# Altium PCB ups_lead_acid_electgpl_v1.0(1).PcbDoc (part 1 of 2)
Units mm, origin at the board's own origin, x right, y up, seen from the top; angles counter-clockwise.
Board outline 152.4 x 101.6 mm, 2 copper layers (F.Cu, B.Cu); 78 components, 42 nets, 240 pads, 288 vias.
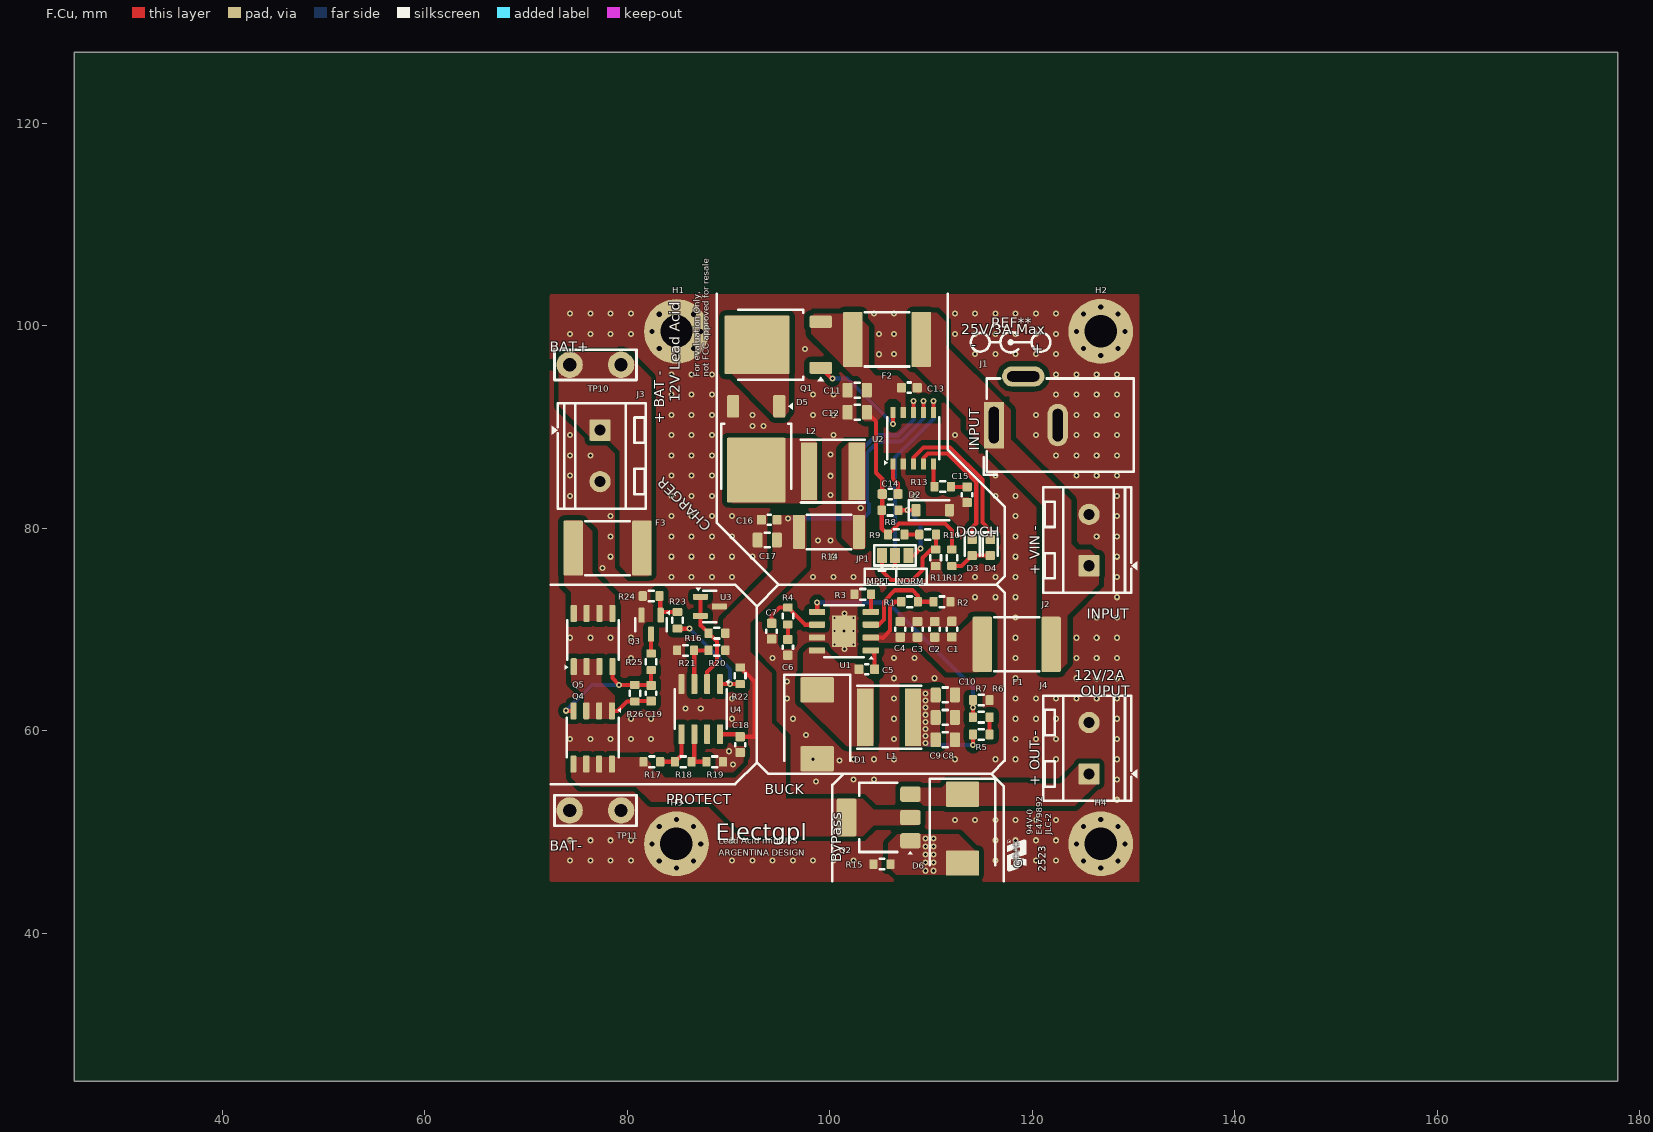
[diagram p0: F.Cu view]
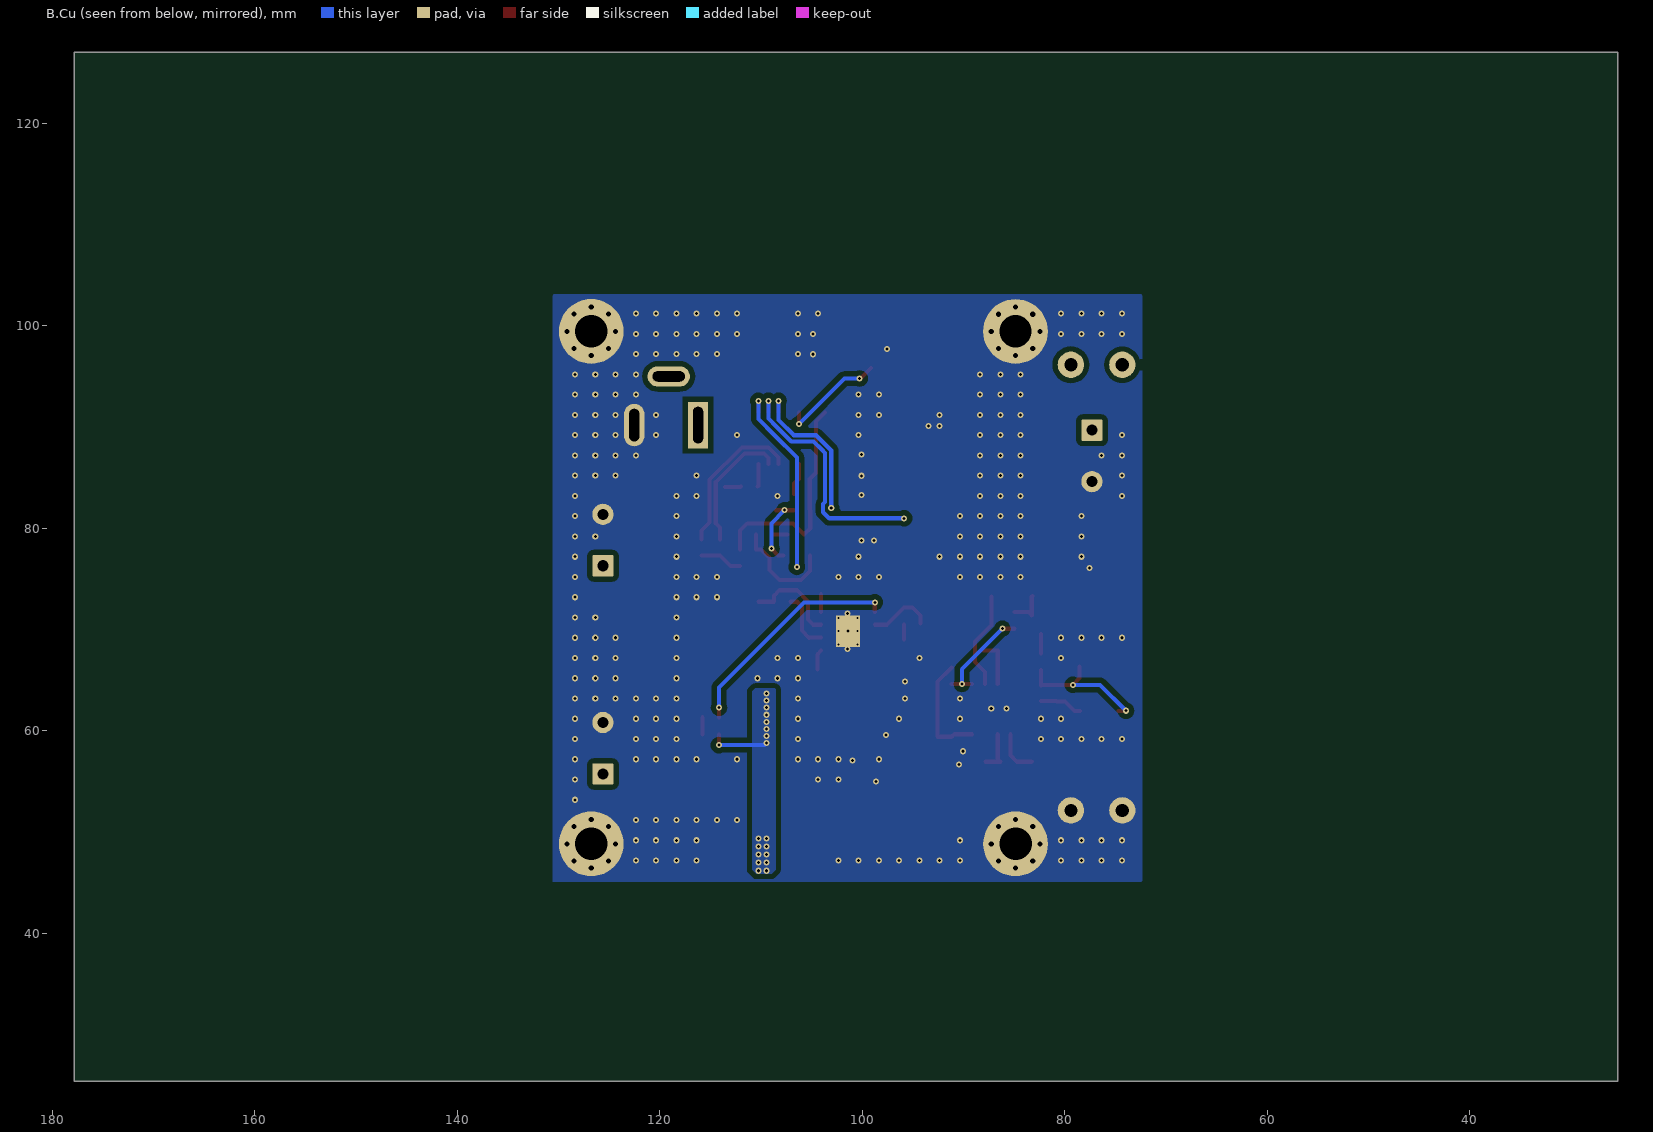
[diagram p1: B.Cu view, seen from below]

## Layer stack, top to bottom
F.Mask: solder mask 0.0102, Solder Resist, Dk 3.5
F.Cu: signal copper 0.0356
Dielectric 1: dielectric 0.32, FR-4, Dk 4.8
B.Cu: signal copper 0.0356
B.Mask: solder mask 0.0102, Solder Resist, Dk 3.5

## Board outline
25.4,25.4 177.8,25.4 177.8,127 25.4,127

## Design rules (kind name [scope] priority, off if disabled: settings)
Clearance "Clearence 0,5_Polygon" [InNamedPolygon('F.Cu-/Battery Protect/BAT+') OR InNamedPolygon('F.Cu-/ByPass/OUTBP') OR InNamedPolygon('F.Cu-Net-(D1-K)') OR InNamedPolygon('F.Cu-Net-(C19-Pad2)') OR InNamedPolygon('F.Cu-Net-(U1-VIN)') OR InNamedPolygon('F.Cu-Net-(F3-Pad2)') OR InNamedPolygon('F.Cu-Net-(D5-K)') OR InNamedPolygon('F.Cu-Net-(Q1-S)') OR InNamedPolygon('F.Cu-/Battery Protect/P+') OR InNamedPolygon('F.Cu-/Buck/VIN') OR InNamedPolygon('F.Cu-Net-(Q1-D)') OR InNamedPolygon('F.Cu-Net-(Q1-S)-1') OR InNamedPolygon('F.Cu-/Buck/VIN-1') OR InNamedPolygon('F.Cu-+12V') OR InNamedPolygon('F.Cu-+12V-1') OR InNamedPolygon('F.Cu-/Battery Protect/P+-1') OR InNamedPolygon('F.Cu-Net-(U2-CSP)') OR InNamedPolygon('F.Cu-/Buck/VIN-2') OR InNamedPolygon('F.Cu-GND') OR InNamedPolygon('B.Cu-GND') OR InNamedPolygon('B.Cu-+12V')] p1: gap=0.5 ignorepadtopadclearanceinfootprint=FALSE
MinimumSolderMaskSliver [All] p1: minsoldermaskwidth=0
PolygonConnect Polygon_B.Cu-+12V_ConnectDirect [IsNamedPolygon('B.Cu-+12V')] p1: connectstyle=Direct reliefconductorwidth=0.254 reliefentries=4 polygonreliefangle="90 Angle" airgapwidth=0.254
PolygonConnect Polygon_B.Cu-GND_ConnectDirect [IsNamedPolygon('B.Cu-GND')] p2: connectstyle=Direct reliefconductorwidth=0.254 reliefentries=4 polygonreliefangle="90 Angle" airgapwidth=0.254
PolygonConnect Polygon_F.Cu-GND_ConnectDirect [IsNamedPolygon('F.Cu-GND')] p3: connectstyle=Direct reliefconductorwidth=0.254 reliefentries=4 polygonreliefangle="90 Angle" airgapwidth=0.254
PolygonConnect Polygon_F.Cu-/Buck/VIN-2_ConnectDirect [IsNamedPolygon('F.Cu-/Buck/VIN-2')] p4: connectstyle=Direct reliefconductorwidth=0.254 reliefentries=4 polygonreliefangle="90 Angle" airgapwidth=0.254
PolygonConnect Polygon_F.Cu-Net-(U2-CSP)_ConnectDirect [IsNamedPolygon('F.Cu-Net-(U2-CSP)')] p5: connectstyle=Direct reliefconductorwidth=0.254 reliefentries=4 polygonreliefangle="90 Angle" airgapwidth=0.254
PolygonConnect "Polygon_F.Cu-/Battery Protect/P+-1_ConnectDirect" [IsNamedPolygon('F.Cu-/Battery Protect/P+-1')] p6: connectstyle=Direct reliefconductorwidth=0.254 reliefentries=4 polygonreliefangle="90 Angle" airgapwidth=0.254
PolygonConnect Polygon_F.Cu-+12V-1_ConnectDirect [IsNamedPolygon('F.Cu-+12V-1')] p7: connectstyle=Direct reliefconductorwidth=0.254 reliefentries=4 polygonreliefangle="90 Angle" airgapwidth=0.254
PolygonConnect Polygon_F.Cu-+12V_ConnectDirect [IsNamedPolygon('F.Cu-+12V')] p8: connectstyle=Direct reliefconductorwidth=0.254 reliefentries=4 polygonreliefangle="90 Angle" airgapwidth=0.254
PolygonConnect Polygon_F.Cu-/Buck/VIN-1_ConnectDirect [IsNamedPolygon('F.Cu-/Buck/VIN-1')] p9: connectstyle=Direct reliefconductorwidth=0.254 reliefentries=4 polygonreliefangle="90 Angle" airgapwidth=0.254
PolygonConnect Polygon_F.Cu-Net-(Q1-S)-1_ConnectDirect [IsNamedPolygon('F.Cu-Net-(Q1-S)-1')] p10: connectstyle=Direct reliefconductorwidth=0.254 reliefentries=4 polygonreliefangle="90 Angle" airgapwidth=0.254
PolygonConnect Polygon_F.Cu-Net-(Q1-D)_ConnectDirect [IsNamedPolygon('F.Cu-Net-(Q1-D)')] p11: connectstyle=Direct reliefconductorwidth=0.254 reliefentries=4 polygonreliefangle="90 Angle" airgapwidth=0.254
PolygonConnect Polygon_F.Cu-/Buck/VIN_ConnectDirect [IsNamedPolygon('F.Cu-/Buck/VIN')] p12: connectstyle=Direct reliefconductorwidth=0.254 reliefentries=4 polygonreliefangle="90 Angle" airgapwidth=0.254
PolygonConnect "Polygon_F.Cu-/Battery Protect/P+_ConnectDirect" [IsNamedPolygon('F.Cu-/Battery Protect/P+')] p13: connectstyle=Direct reliefconductorwidth=0.254 reliefentries=4 polygonreliefangle="90 Angle" airgapwidth=0.254
PolygonConnect Polygon_F.Cu-Net-(Q1-S)_ConnectDirect [IsNamedPolygon('F.Cu-Net-(Q1-S)')] p14: connectstyle=Direct reliefconductorwidth=0.254 reliefentries=4 polygonreliefangle="90 Angle" airgapwidth=0.254
PolygonConnect Polygon_F.Cu-Net-(D5-K)_ConnectDirect [IsNamedPolygon('F.Cu-Net-(D5-K)')] p15: connectstyle=Direct reliefconductorwidth=0.254 reliefentries=4 polygonreliefangle="90 Angle" airgapwidth=0.254
PolygonConnect Polygon_F.Cu-Net-(F3-Pad2)_ConnectDirect [IsNamedPolygon('F.Cu-Net-(F3-Pad2)')] p16: connectstyle=Direct reliefconductorwidth=0.254 reliefentries=4 polygonreliefangle="90 Angle" airgapwidth=0.254
PolygonConnect Polygon_F.Cu-Net-(U1-VIN)_ConnectDirect [IsNamedPolygon('F.Cu-Net-(U1-VIN)')] p17: connectstyle=Direct reliefconductorwidth=0.254 reliefentries=4 polygonreliefangle="90 Angle" airgapwidth=0.254
PolygonConnect Polygon_F.Cu-Net-(C19-Pad2)_ConnectDirect [IsNamedPolygon('F.Cu-Net-(C19-Pad2)')] p18: connectstyle=Direct reliefconductorwidth=0.254 reliefentries=4 polygonreliefangle="90 Angle" airgapwidth=0.254
PolygonConnect Polygon_F.Cu-Net-(D1-K)_ConnectDirect [IsNamedPolygon('F.Cu-Net-(D1-K)')] p19: connectstyle=Direct reliefconductorwidth=0.254 reliefentries=4 polygonreliefangle="90 Angle" airgapwidth=0.254
PolygonConnect Polygon_F.Cu-/ByPass/OUTBP_ConnectDirect [IsNamedPolygon('F.Cu-/ByPass/OUTBP')] p20: connectstyle=Direct reliefconductorwidth=0.254 reliefentries=4 polygonreliefangle="90 Angle" airgapwidth=0.254
PolygonConnect "Polygon_F.Cu-/Battery Protect/BAT+_ConnectDirect" [IsNamedPolygon('F.Cu-/Battery Protect/BAT+')] p21: connectstyle=Direct reliefconductorwidth=0.254 reliefentries=4 polygonreliefangle="90 Angle" airgapwidth=0.254
RoutingVias [All] p1: holewidth=0.711 width=1.27 viastyle="Through Hole" minholewidth=0.711 minwidth=1.27 maxholewidth=0.711 maxwidth=1.27
SilkToSilkClearance [All] p1: silktosilkclearance=0
SilkToSolderMaskClearance [IsPad] p1: minsilkscreentomaskgap=0 clearancetoexposedcopper=TRUE
SolderMaskExpansion [All] p1: expansion=0.102 istentingtop=FALSE
Width [All] p1: maxlimit=10 minlimit=0.254 preferedwidth=0.254 minimp=50.000000 maximp=50.000000 favimp=50.000000
27 further rules are at their usual default settings.

## Components (designator, comment, footprint, x,y, rotation, side; value= is the part's Value field where it differs from the comment)
C1 "Comment" C_0603_1608Metric 112.056,70.043 r270 top value=2u2
C2 "Comment" C_0603_1608Metric 110.356,70.018 r270 top value=2u2
C3 "Comment" C_0603_1608Metric 108.656,70.018 r270 top value=2u2
C4 "Comment" C_0603_1608Metric 106.956,70.018 r270 top value=2u2
C5 "Comment" C_0603_1608Metric 103.656,66.085 r180 top value=100n
C6 "Comment" C_0603_1608Metric 95.856,68.243 r270 top value=4n7
C7 "Comment" C_0603_1608Metric 94.256,69.843 r270 top value=47p
C8 "Comment" C_0805_2012Metric 111.406,59.123 r180 top value=47u
C9 "Comment" C_0805_2012Metric 111.406,61.323 r180 top value=47u
C10 "Comment" C_0805_2012Metric 111.406,63.543 r180 top value=47u
C11 "Comment" C_0805_2012Metric 102.706,93.643 r180 top value=47u
C12 "Comment" C_0805_2012Metric 102.706,91.443 r180 top value=47u
C13 "Comment" C_0603_1608Metric 107.856,93.885 r0 top value=100n
C14 "Comment" C_0603_1608Metric 105.956,83.385 r0 top value=100n
C15 "Comment" C_0603_1608Metric 113.556,83.318 r270 top value=220n
C16 "Comment" C_0603_1608Metric 94.018,80.843 r180 top value=100n
C17 "Comment" C_0805_2012Metric 93.818,78.843 r180 top value=47u
C18 "Comment" C_0603_1608Metric 91.156,58.643 r270 top value=100n
C19 "Comment" C_0603_1608Metric 82.356,63.718 r270 top value=10n
D1 "Comment" D_SMC 98.756,60.642 r270 top value=SS54
D2 "Comment" D_SOD-123 110.156,81.785 r0 top value=5V1
D3 "Comment" LED_0603_1608Metric 114.056,78.098 r270 top value=LED
D4 "Comment" LED_0603_1608Metric 115.856,78.098 r270 top value=LED
D5 "Comment" TO-252-2 92.734,87.003 r270 top value=MBRD20100CT
D6 "Comment" D_SMC 113.106,50.343 r270 top value=SS54
F1 "Comment" Fuse_2920_7451Metric 118.456,68.543 r180 top value=500/24N
F2 "Comment" Fuse_2920_7451Metric 105.656,98.643 r180 top value=500/24N
F3 "Comment" Fuse_2920_7451Metric 78.056,78.043 r180 top value=500/24N
G*** "Comment" "Recognized Component very small" 118.456,47.685 r90 top value=LOGO
H1 "Comment" MountingHole_3.2mm_M3_Pad_Via 84.859,99.44 r0 top value=MountingHole_Pad
H2 "Comment" MountingHole_3.2mm_M3_Pad_Via 126.756,99.443 r0 top value=MountingHole_Pad
H3 "Comment" MountingHole_3.2mm_M3_Pad_Via 84.856,48.843 r0 top value=MountingHole_Pad
H4 "Comment" MountingHole_3.2mm_M3_Pad_Via 126.756,48.843 r0 top value=MountingHole_Pad
J1 "Comment" BarrelJack_GCT_DCJ200-10-A_Horizontal 116.206,90.193 r90 top value=Barrel_Jack_Switch
J2 "Comment" TerminalBlock_RND_205-00232_1x02_P5.08mm_Horizontal 125.598,76.298 r90 top value=Screw_Terminal_01x02
J3 "Comment" TerminalBlock_RND_205-00232_1x02_P5.08mm_Horizontal 77.314,89.688 r270 top value=Screw_Terminal_01x02
J4 "Comment" TerminalBlock_RND_205-00232_1x02_P5.08mm_Horizontal 125.598,55.743 r90 top value=Screw_Terminal_01x02
JP1 "Comment" SolderJumper-3_P1.3mm_Open_Pad1.0x1.5mm 106.456,77.328 r0 top value=MPPT
L1 "Comment" L_Taiyo-Yuden_NR-60xx 105.856,61.343 r0 top value=10u
L2 "Comment" L_Taiyo-Yuden_NR-60xx 100.306,85.643 r0 top value=10u
Q1 "Comment" TO-252-2 94.073,98.115 r180 top value=DMP4051LK3-13
Q2 "Comment" SOT-223-3_TabPin2 104.806,51.443 r180 top value=NTF6P02
Q3 "Comment" SOT-23 82.356,70.48 r270 top value=2N7002
Q4 "Comment" SOP-8_3.9x4.9mm_P1.27mm 76.586,59.343 r270 top value=AO4407
Q5 "Comment" SOP-8_3.9x4.9mm_P1.27mm 76.621,68.967 r90 top value=AO4407
R1 "Comment" R_0603_1608Metric 107.881,72.743 r0 top value=442k
R2 "Comment" R_0603_1608Metric 111.081,72.743 r0 top value=90k9
R3 "Comment" R_0603_1608Metric 103.256,73.485 r180 top value=243k
R4 "Comment" R_0603_1608Metric 95.856,71.343 r270 top value=16k9
R5 "Comment" R_0603_1608Metric 114.956,59.643 r0 top value=49R9
R6 "Comment" R_0603_1608Metric 114.956,61.343 r180 top value=33k
R7 "Comment" R_0603_1608Metric 114.956,63.043 r0 top value=2k2
R8 "Comment" R_0603_1608Metric 105.956,81.785 r0 top value=100k
R9 "Comment" R_0603_1608Metric 106.556,79.385 r0 top value=1M
R10 "Comment" R_0603_1608Metric 109.656,79.385 r0 top value=360k
R11 "Comment" R_0603_1608Metric 110.456,77.085 r270 top value=100k
R12 "Comment" R_0603_1608Metric 112.056,77.085 r270 top value=10k
R13 "Comment" R_0603_1608Metric 111.156,84.118 r0 top value=120R
R14 "Comment" R_2512_6332Metric 99.918,79.643 r180 top value=0R12
R15 "Comment" R_0603_1608Metric 105.156,46.843 r0 top value=100k
R16 "Comment" R_0603_1608Metric 88.856,69.643 r180 top value=10k
R17 "Comment" R_0603_1608Metric 82.431,56.943 r0 top value=47k
R18 "Comment" R_0603_1608Metric 85.531,56.943 r0 top value=47k
R19 "Comment" R_0603_1608Metric 88.631,56.943 r0 top value=47k
R20 "Comment" R_0603_1608Metric 88.856,67.943 r180 top value=15k
R21 "Comment" R_0603_1608Metric 85.756,67.943 r180 top value=4k7
R22 "Comment" R_0603_1608Metric 91.156,65.443 r270 top value=10k
R23 "Comment" R_0603_1608Metric 84.956,70.918 r90 top value=10k
R24 "Comment" R_0603_1608Metric 82.356,73.318 r180 top value=10k
R25 "Comment" R_0603_1608Metric 82.356,66.818 r90 top value=10R
R26 "Comment" R_0603_1608Metric 80.756,63.718 r270 top value=10k
REF** "Comment" Symbol_Barrel_Polarity 117.856,98.443 r0 top value=Symbol_Barrel_Polarity
TP10 "Comment" TestPoint_Bridge_Pitch5.08mm_Drill1.3mm 74.316,96.143 r0 top value=TestPoint_Alt
TP11 "Comment" TestPoint_Bridge_Pitch5.08mm_Drill1.3mm 74.316,52.143 r0 top value=TestPoint_Alt
U1 "Comment" HSOP-8-1EP_3.9x4.9mm_P1.27mm_EP2.41x3.1mm_ThermalVias 101.401,69.843 r180 top value=TPS54360DDA
U2 "Comment" SSOP-10_3.9x4.9mm_P1.00mm 108.256,88.885 r90 top value=CN3767
U3 "Comment" SOT-23 88.156,72.285 r0 top value=TL431AIDBZR
U4 "Comment" SOIC-8_3.9x4.9mm_P1.27mm 87.256,62.143 r270 top value=LM393

## Footprints (in the part's own frame and the unit in brackets; to place one, negate y for a bottom-side part, rotate by r counter-clockwise, add the part's x,y. Pads: shape width x height; smd on the part's side, far side on the other; paste and mask are expansions set on the pad)
BarrelJack_GCT_DCJ200-10-A_Horizontal [mm]
  rect 4.6x2 hole 1 slot 3.6 at 0 deg mask+0: 1(0,0)
  rrect100% 4.2x2 hole 1 slot 3.2 at 0 deg mask+0: 2(0,-6.3)
  rrect100% 2x4.2 hole 3.2 slot 1 at 0 deg mask+0: 3(4.8,-2.9)
  silkscreen extent -4.9,-13.8 4.6,1
C_0603_1608Metric [mm]
  rrect25% 0.9x0.95 smd mask+0: 1(-0.775,0) 2(0.775,0)
  silkscreen extent -0.14,-0.51 0.14,0.51
C_0805_2012Metric [mm]
  rrect25% 1x1.45 smd mask+0: 1(-0.95,0) 2(0.95,0)
  silkscreen extent -0.26,-0.73 0.26,0.73
D_SMC [mm]
  rrect10% 2.5x3.3 smd mask+0: 1(-3.4,0) 2(3.4,0)
  silkscreen extent -4.91,-3.25 3.6,3.25
D_SOD-123 [mm]
  rrect25% 0.9x1.2 smd mask+0: 1(-1.65,0) 2(1.65,0)
  silkscreen extent -2.36,-1 1.65,1
Fuse_2920_7451Metric [mm]
  rrect13% 1.925x5.45 smd mask+0: 1(-3.387,0) 2(3.387,0)
  silkscreen extent -2.2,-2.67 2.2,2.67
HSOP-8-1EP_3.9x4.9mm_P1.27mm_EP2.41x3.1mm_ThermalVias [mm]
  rrect25% 1.6x0.6 smd mask+0: 1(-2.65,1.905) 2(-2.65,0.635) 3(-2.65,-0.635) 4(-2.65,-1.905) 5(2.65,-1.905) 6(2.65,-0.635) 7(2.65,0.635) 8(2.65,1.905)
  round 0.5 hole 0.2 mask+0: 9(-0.955,1.3) 9(-0.955,0) 9(-0.955,-1.3) 9(0.955,1.3) 9(0.955,0) 9(0.955,-1.3)
  rect 2.41x3.1 smd paste-3.1 mask+0: 9(0,0)
  rect 2.41x3.1 smd far side paste-3.1 mask-3.1: 9(0,0)
  rrect25% 0.97x1.25 on Top Paste mask-1.25: Un1(-0.6,0.775) Un2(-0.6,-0.775) Un3(0.6,0.775) Un4(0.6,-0.775)
  silkscreen extent -2.94,-2.56 1.95,2.8
L_Taiyo-Yuden_NR-60xx [mm]
  rect 1.6x5.7 smd mask+0: 1(-2.35,0) 2(2.35,0)
  silkscreen extent -3.15,-3.1 3.15,3.1
LED_0603_1608Metric [mm]
  rrect25% 0.875x0.95 smd mask+0: 1(-0.787,0) 2(0.787,0)
  silkscreen extent -1.49,-0.73 0.8,0.73
MountingHole_3.2mm_M3_Pad_Via [mm]
  round 0.8 hole 0.5 mask+0: 1(-2.4,0) 1(-1.697,-1.697) 1(-1.697,1.697) 1(0,-2.4) 1(0,2.4) 1(1.697,-1.697) 1(1.697,1.697) 1(2.4,0)
  round 6.4 hole 3.2 mask+0: 1(0,0)
R_0603_1608Metric [mm]
  rrect25% 0.8x0.95 smd mask+0: 1(-0.825,0) 2(0.825,0)
  silkscreen extent -0.24,-0.52 0.24,0.52
R_2512_6332Metric [mm]
  rrect20% 1.225x3.35 smd mask+0: 1(-2.963,0) 2(2.963,0)
  silkscreen extent -2.18,-1.71 2.18,1.71
"Recognized Component very small" [mm]
  silkscreen extent -1.56,-0.94 1.56,0.94
SOIC-8_3.9x4.9mm_P1.27mm [mm]
  rrect25% 1.95x0.6 smd mask+0: 1(-2.475,1.905) 2(-2.475,0.635) 3(-2.475,-0.635) 4(-2.475,-1.905) 5(2.475,-1.905) 6(2.475,-0.635) 7(2.475,0.635) 8(2.475,1.905)
  silkscreen extent -2.94,-2.56 1.95,2.8
SolderJumper-3_P1.3mm_Open_Pad1.0x1.5mm [mm]
  rect 1x1.5 smd paste-1.5 mask+0: 1(-1.3,0) 2(0,0) 3(1.3,0)
  silkscreen extent -2.05,-1.5 2.05,1
SOP-8_3.9x4.9mm_P1.27mm [mm]
  rrect25% 1.65x0.6 smd mask+0: 1(-2.625,1.905) 2(-2.625,0.635) 3(-2.625,-0.635) 4(-2.625,-1.905) 5(2.625,-1.905) 6(2.625,-0.635) 7(2.625,0.635) 8(2.625,1.905)
  silkscreen extent -2.94,-2.56 1.95,2.8
SOT-23 [mm]
  rrect25% 1.475x0.6 smd mask+0: 1(-0.937,0.95) 2(-0.937,-0.95) 3(0.937,0)
  silkscreen extent -1.4,-1.56 0.65,1.84
SOT-223-3_TabPin2 [mm]
  rrect25% 2x1.5 smd mask+0: 1(-3.15,2.3) 2(-3.15,0) 3(-3.15,-2.3)
  rrect25% 2x3.8 smd mask+0: 2(3.15,0)
  silkscreen extent -3.37,-3.41 1.91,3.64
SSOP-10_3.9x4.9mm_P1.00mm [mm]
  rect 1.1x0.51 smd mask+0: 1(-2.55,2) 2(-2.55,1) 3(-2.55,0) 4(-2.55,-1) 5(-2.55,-2) 6(2.55,-2) 7(2.55,-1) 8(2.55,0) 9(2.55,1) 10(2.55,2)
  silkscreen extent -2.64,-2.57 2.07,2.86
Symbol_Barrel_Polarity [mm]
  silkscreen extent -3.92,-1.08 3.92,0.93
TerminalBlock_RND_205-00232_1x02_P5.08mm_Horizontal [mm]
  rrect12% 2.1x2.1 hole 1.1 mask+0: 1(0,0)
  round 2.1 hole 1.1 mask+0: 2(5.08,0)
  silkscreen extent -2.66,-4.78 7.74,4.52
TestPoint_Bridge_Pitch5.08mm_Drill1.3mm [mm]
  round 2.6 hole 1.3 mask+0: 1(0,0) 1(5.08,0)
  silkscreen extent -1.5,-1.5 6.6,1.5
TO-252-2 [mm]
  rrect21% 2.2x1.2 smd mask+0: 1(-5.04,2.28) 3(-5.04,-2.28)
  rrect4% 6.4x5.8 smd paste-6.4 mask+0: 2(1.26,0)
  rrect9% 3.05x2.75 on Top Paste mask-3.05: Un1(-0.415,1.525) Un2(-0.415,-1.525) Un3(2.935,1.525) Un4(2.935,-1.525)
  silkscreen extent -5.38,-3.45 3.11,3.61

## Part data
C1 C2 C3 C4: library part C_0603_1608Metric, "Capacitor SMD 0603 (1608 Metric), square (rectangular) end terminal, IPC-7351 nominal, (Body size source: IPC-SM-782 page 76, https://www.pcb-3d.com/wordpress/wp-content/uploads/ipc-sm-782a_amendment_1_and_2.pdf), generated with kicad-footprint-generator", LCSC=C913904, MFR P/N=CL10A225KB8NNNC, Description="Unpolarized capacitor", Absolute minimum=100V, Reference MFG P/N=C6119935, ki_fp_filters=C_*
C5 C13 C14 C16 C18: library part C_0603_1608Metric, "Capacitor SMD 0603 (1608 Metric), square (rectangular) end terminal, IPC-7351 nominal, (Body size source: IPC-SM-782 page 76, https://www.pcb-3d.com/wordpress/wp-content/uploads/ipc-sm-782a_amendment_1_and_2.pdf), generated with kicad-footprint-generator", LCSC=C1591, MFR P/N=CL10B104KB8NNNC, ki_fp_filters=C_*
  C5: Description="Unpolarized capacitor", Absolute minimum=50V, Reference MFG P/N=C5142567
  C13 C14 C16: Internal P/N=C100N-50-0603
  C18: Description="Unpolarized capacitor, small symbol"
C6: library part C_0603_1608Metric, "Capacitor SMD 0603 (1608 Metric), square (rectangular) end terminal, IPC-7351 nominal, (Body size source: IPC-SM-782 page 76, https://www.pcb-3d.com/wordpress/wp-content/uploads/ipc-sm-782a_amendment_1_and_2.pdf), generated with kicad-footprint-generator", LCSC=C1621, MFR P/N=CL10B472KB8NNNC, Description="Unpolarized capacitor", Absolute minimum=50V, Reference MFG P/N=C7503510, ki_fp_filters=C_*
C7: library part C_0603_1608Metric, "Capacitor SMD 0603 (1608 Metric), square (rectangular) end terminal, IPC-7351 nominal, (Body size source: IPC-SM-782 page 76, https://www.pcb-3d.com/wordpress/wp-content/uploads/ipc-sm-782a_amendment_1_and_2.pdf), generated with kicad-footprint-generator", LCSC=C1671, MFR P/N=CL10C470JB8NNNC, Description="Unpolarized capacitor", Absolute minimum=50V, Reference MFG P/N=C466230, ki_fp_filters=C_*
C8 C9 C10 C11 C12 C17: library part C_0805_2012Metric, "Capacitor SMD 0805 (2012 Metric), square (rectangular) end terminal, IPC-7351 nominal, (Body size source: IPC-SM-782 page 76, https://www.pcb-3d.com/wordpress/wp-content/uploads/ipc-sm-782a_amendment_1_and_2.pdf, https://docs.google.com/spreadsheets/d/1BsfQQcO9C6DZCsRaXUlFlo91Tg2WpOkGARC1WS5S8t0/edit?usp=sharing), generated with kicad-footprint-generator", LCSC=C602037, MFR P/N=CL21A226MAYNNNE
  C8 C9 C10: Description="Unpolarized capacitor", Absolute minimum=10V, Reference MFG P/N=C19103846, ki_fp_filters=C_*
  C11 C12 C17: Internal P/N=C47U-25-5_5.4, ki_fp_filters=CP_*
C15: library part C_0603_1608Metric, "Capacitor SMD 0603 (1608 Metric), square (rectangular) end terminal, IPC-7351 nominal, (Body size source: IPC-SM-782 page 76, https://www.pcb-3d.com/wordpress/wp-content/uploads/ipc-sm-782a_amendment_1_and_2.pdf), generated with kicad-footprint-generator", LCSC=C64705, MFR P/N=CL10B224KB8NNNC, Internal P/N=C220N-50-0603, ki_fp_filters=C_*
C19: library part C_0603_1608Metric, "Capacitor SMD 0603 (1608 Metric), square (rectangular) end terminal, IPC-7351 nominal, (Body size source: IPC-SM-782 page 76, https://www.pcb-3d.com/wordpress/wp-content/uploads/ipc-sm-782a_amendment_1_and_2.pdf), generated with kicad-footprint-generator", LCSC=C1589, MFR P/N=CL10B103KB8NNNC, Description="Unpolarized capacitor, small symbol", ki_fp_filters=C_*
D1 D6: library part D_SMC, "Diode SMC (DO-214AB)", LCSC=C5199108, MFR P/N=SS54, Datasheet=http://www.jameco.com/Jameco/Products/ProdDS/1538777.pdf, Description="40V 2A Schottky Barrier Rectifier Diode, SMB", Absolute minimum="40V 5A", Reference MFG P/N=C5200096, ki_fp_filters=D*SMB*
D2: library part D_SOD-123, "SOD-123", LCSC=C66198, MFR P/N=MMSZ5231BT1G, Internal P/N=DZ-5.1, ki_fp_filters="TO-???* *_Diode_* *SingleDiode* D_*"
D3 D4: library part LED_0603_1608Metric, "LED SMD 0603 (1608 Metric), square (rectangular) end terminal, IPC-7351 nominal, (Body size source: http://www.tortai-tech.com/upload/download/2011102023233369053.pdf), generated with kicad-footprint-generator", LCSC=C965802, MFR P/N=XL-1608UYC-06, ki_fp_filters="LED* LED_SMD:* LED_THT:*"
  D3: Internal P/N=DL-GREEN-0603
  D4: Internal P/N=DL-RED-0603
D5: library part TO-252-2, "TO-252/DPAK SMD package, http://www.infineon.com/cms/en/product/packages/PG-TO252/PG-TO252-3-1/", LCSC=C460890, MFR P/N=MBRD20100CT-13, Description="20A SCHOTTKY BARRIER RECTIFIER"
F1 F2 F3: library part Fuse_2920_7451Metric, "Fuse SMD 2920 (7451 Metric), square (rectangular) end terminal, IPC-7351 nominal, (Body size from: http://www.megastar.com/products/fusetronic/polyswitch/PDF/smd2920.pdf), generated with kicad-footprint-generator", LCSC=C6165172, MFR P/N=SMD2920-500/24N, Description="24V 5A 40A 10A 2920 Resettable Fuses ROHS", Absolute minimum="16V 3A", Reference MFG P/N=C6165172, ki_fp_filters="*polyfuse* *PTC*"
G***: library part "Recognized Component very small"
H1 H2 H3 H4: library part MountingHole_3.2mm_M3_Pad_Via, "Mounting Hole 3.2mm, M3, generated by kicad-footprint-generator mountinghole.py", Description="Mounting Hole with connection", ki_fp_filters=MountingHole*Pad*
J1: library part BarrelJack_GCT_DCJ200-10-A_Horizontal, "Barrel jack connector (5.5 mm outer diameter, 2.05 inner diameter ), https://gct.co/files/drawings/dcj200-10.pdf", LCSC=C194407, MFR P/N=DC-470-2.1GP, Description="DC Barrel Jack with an internal switch", ki_fp_filters=BarrelJack*
J2 J3 J4: library part TerminalBlock_RND_205-00232_1x02_P5.08mm_Horizontal, "terminal block RND 205-00232, 2 pins, pitch 5.08mm, size 10.2x8.45mm, drill diameter 1.1mm, pad diameter 2.1mm, http://cdn-reichelt.de/documents/datenblatt/C151/RND_205-00232_DB_EN.pdf, script-generated using https://gitlab.com/kicad/libraries/kicad-footprint-generator/-/tree/master/scripts/TerminalBlock_RND", LCSC=C8465, MFR P/N=WJ500V-5.08-2P, Description="Generic screw terminal, single row, 01x02, script generated (kicad-library-utils/schlib/autogen/connector/)", ki_fp_filters=TerminalBlock*:*
JP1: library part SolderJumper-3_P1.3mm_Open_Pad1.0x1.5mm, "SMD Solder 3-pad Jumper, 1x1.5mm Pads, 0.3mm gap, open", ki_fp_filters="Jumper* TestPoint*3Pads* TestPoint*Bridge*"
L1 L2: library part L_Taiyo-Yuden_NR-60xx, "Inductor, Taiyo Yuden, NR series, Taiyo-Yuden_NR-60xx, 6.0mmx6.0mm", LCSC=C360734, MFR P/N=VLS6045EX-100M, ki_fp_filters="Choke_* *Coil* Inductor_* L_*"
  L1: Description="Inductor with ferrite core", Absolute minimum=5A, Reference MFG P/N=C2849537
  L2: Internal P/N=L10U-10-12_12_6
Q1: library part TO-252-2, "TO-252/DPAK SMD package, http://www.infineon.com/cms/en/product/packages/PG-TO252/PG-TO252-3-1/", LCSC=C397952, MFR P/N=DMP4051LK3-13, Datasheet=http://www.jaolen.com/images/pdf/QM6015D.pdf, Description="-35A Id, -60V Vds, P-Channel Power MOSFET, 25mOhm Ron, 25.0nC Qg (typ), TO252", ki_fp_filters=TO?252*
Q2: library part SOT-223-3_TabPin2, "module CMS SOT223 4 pins", LCSC Part=C154901, LCSC=C558214, MFR P/N=NTF6P02T3G-VB, Datasheet=https://www.lcsc.com/datasheet/lcsc_datasheet_1808280023_Diodes-Incorporated-DMP6023LE-13_C154901.pdf, Description="60V 2W 28mΩ@10V,5A 3V@250uA 1 Piece P-Channel SOT-223-4 MOSFETs ROHS"
Q3: library part SOT-23, "SOT, 3 Pin (JEDEC TO-236 Var AB https://www.jedec.org/document_search?search_api_views_fulltext=TO-236), generated with kicad-footprint-generator ipc_gullwing_generator.py", LCSC=C65189, MFR P/N=2N7002,215, Datasheet=https://www.onsemi.com/pub/Collateral/NDS7002A-D.PDF, Description="0.115A Id, 60V Vds, N-Channel MOSFET, SOT-23", ki_fp_filters=SOT?23*
Q4 Q5: library part SOP-8_3.9x4.9mm_P1.27mm, "SOP, 8 Pin (http://www.macronix.com/Lists/Datasheet/Attachments/7534/MX25R3235F,%20Wide%20Range,%2032Mb,%20v1.6.pdf#page=79), generated with kicad-footprint-generator ipc_gullwing_generator.py", LCSC=C2841482, MFR P/N=AO4407A, Datasheet=http://www.infineon.com/dgdl/irf7404.pdf?fileId=5546d462533600a4015355fa2b5b1b9e, Description="-6.7A Id, -20V Vds, P-Channel HEXFET Power MOSFET, SO-8", ki_fp_filters=SOIC*3.9x4.9mm*P1.27mm*
R1: library part R_0603_1608Metric, "Resistor SMD 0603 (1608 Metric), square (rectangular) end terminal, IPC-7351 nominal, (Body size source: IPC-SM-782 page 72, https://www.pcb-3d.com/wordpress/wp-content/uploads/ipc-sm-782a_amendment_1_and_2.pdf), generated with kicad-footprint-generator", LCSC=C23175, MFR P/N=0603WAF4423T5E, Description="Resistor, small US symbol", Absolute minimum="442k 0402", Reference MFG P/N=C3016035, ki_fp_filters=R_*
R2: library part R_0603_1608Metric, "Resistor SMD 0603 (1608 Metric), square (rectangular) end terminal, IPC-7351 nominal, (Body size source: IPC-SM-782 page 72, https://www.pcb-3d.com/wordpress/wp-content/uploads/ipc-sm-782a_amendment_1_and_2.pdf), generated with kicad-footprint-generator", LCSC=C2930136, MFR P/N=FRC0603F9092TS, Description="Resistor, small US symbol", Absolute minimum="90k9 0402", Reference MFG P/N=C26989, ki_fp_filters=R_*
R3: library part R_0603_1608Metric, "Resistor SMD 0603 (1608 Metric), square (rectangular) end terminal, IPC-7351 nominal, (Body size source: IPC-SM-782 page 72, https://www.pcb-3d.com/wordpress/wp-content/uploads/ipc-sm-782a_amendment_1_and_2.pdf), generated with kicad-footprint-generator", LCSC=C7467321, MFR P/N=FRC0603F2433TS, Description="Resistor, small US symbol", Absolute minimum="243k 0402", Reference MFG P/N=C2998149, ki_fp_filters=R_*
R4: library part R_0603_1608Metric, "Resistor SMD 0603 (1608 Metric), square (rectangular) end terminal, IPC-7351 nominal, (Body size source: IPC-SM-782 page 72, https://www.pcb-3d.com/wordpress/wp-content/uploads/ipc-sm-782a_amendment_1_and_2.pdf), generated with kicad-footprint-generator", LCSC=C2933158, MFR P/N=FRC0603F1692TS, Description="Resistor, small US symbol", Absolute minimum="16k9 0402", Reference MFG P/N=C2929989, ki_fp_filters=R_*
R5: library part R_0603_1608Metric, "Resistor SMD 0603 (1608 Metric), square (rectangular) end terminal, IPC-7351 nominal, (Body size source: IPC-SM-782 page 72, https://www.pcb-3d.com/wordpress/wp-content/uploads/ipc-sm-782a_amendment_1_and_2.pdf), generated with kicad-footprint-generator", LCSC=C2930110, MFR P/N=FRC0603F49R9TS, Description="Resistor, small US symbol", Absolute minimum="49R9 0402", Reference MFG P/N=C25120, ki_fp_filters=R_*
R6: library part R_0603_1608Metric, "Resistor SMD 0603 (1608 Metric), square (rectangular) end terminal, IPC-7351 nominal, (Body size source: IPC-SM-782 page 72, https://www.pcb-3d.com/wordpress/wp-content/uploads/ipc-sm-782a_amendment_1_and_2.pdf), generated with kicad-footprint-generator", LCSC=C2907153, MFR P/N="FRC0603J333 TS", Description="Resistor, small US symbol", Absolute minimum="53k6 0402", Reference MFG P/N=C5153961, ki_fp_filters=R_*
R7: library part R_0603_1608Metric, "Resistor SMD 0603 (1608 Metric), square (rectangular) end terminal, IPC-7351 nominal, (Body size source: IPC-SM-782 page 72, https://www.pcb-3d.com/wordpress/wp-content/uploads/ipc-sm-782a_amendment_1_and_2.pdf), generated with kicad-footprint-generator", LCSC=C2907117, MFR P/N="FRC0603J222 TS", Description="Resistor, small US symbol", Absolute minimum="10k2 0402", Reference MFG P/N=C3015976, ki_fp_filters=R_*
R8 R11: library part R_0603_1608Metric, "Resistor SMD 0603 (1608 Metric), square (rectangular) end terminal, IPC-7351 nominal, (Body size source: IPC-SM-782 page 72, https://www.pcb-3d.com/wordpress/wp-content/uploads/ipc-sm-782a_amendment_1_and_2.pdf), generated with kicad-footprint-generator", LCSC=C2907088, MFR P/N="FRC0603J104 TS", Internal P/N=R100K-0603-1, ki_fp_filters=R_*
  R11: Aux=Rc
R9: library part R_0603_1608Metric, "Resistor SMD 0603 (1608 Metric), square (rectangular) end terminal, IPC-7351 nominal, (Body size source: IPC-SM-782 page 72, https://www.pcb-3d.com/wordpress/wp-content/uploads/ipc-sm-782a_amendment_1_and_2.pdf), generated with kicad-footprint-generator", LCSC=C2907003, MFR P/N=FRC0603F1004TS, Aux=Ra, Internal P/N=R1M-0603-1, ki_fp_filters=R_*
R10: library part R_0603_1608Metric, "Resistor SMD 0603 (1608 Metric), square (rectangular) end terminal, IPC-7351 nominal, (Body size source: IPC-SM-782 page 72, https://www.pcb-3d.com/wordpress/wp-content/uploads/ipc-sm-782a_amendment_1_and_2.pdf), generated with kicad-footprint-generator", LCSC=C2907029, MFR P/N=FRC0603F3603TS, Aux=Rb, Internal P/N=R360K-0603-1, ki_fp_filters=R_*
R12 R16 R22 R23 R24 R26: library part R_0603_1608Metric, "Resistor SMD 0603 (1608 Metric), square (rectangular) end terminal, IPC-7351 nominal, (Body size source: IPC-SM-782 page 72, https://www.pcb-3d.com/wordpress/wp-content/uploads/ipc-sm-782a_amendment_1_and_2.pdf), generated with kicad-footprint-generator", LCSC=C2930027, MFR P/N="FRC0603J103 TS", ki_fp_filters=R_*
  R12: Internal P/N=R10K-0603-1
  R16 R22 R23 R24 R26: Description="Resistor, small US symbol"
R13: library part R_0603_1608Metric, "Resistor SMD 0603 (1608 Metric), square (rectangular) end terminal, IPC-7351 nominal, (Body size source: IPC-SM-782 page 72, https://www.pcb-3d.com/wordpress/wp-content/uploads/ipc-sm-782a_amendment_1_and_2.pdf), generated with kicad-footprint-generator", LCSC=C2907096, MFR P/N="FRC0603J121 TS", Internal P/N=R120-0603-1, ki_fp_filters=R_*
R14: library part R_2512_6332Metric, "Resistor SMD 2512 (6332 Metric), square (rectangular) end terminal, IPC-7351 nominal, (Body size source: IPC-SM-782 page 72, https://www.pcb-3d.com/wordpress/wp-content/uploads/ipc-sm-782a_amendment_1_and_2.pdf), generated with kicad-footprint-generator", LCSC=C875871, MFR P/N=PT2512FK-7W0R12L, Internal P/N=R0.03-2512_2W-1, ki_fp_filters=R_*
R15: library part R_0603_1608Metric, "Resistor SMD 0603 (1608 Metric), square (rectangular) end terminal, IPC-7351 nominal, (Body size source: IPC-SM-782 page 72, https://www.pcb-3d.com/wordpress/wp-content/uploads/ipc-sm-782a_amendment_1_and_2.pdf), generated with kicad-footprint-generator", LCSC Part=C99198, LCSC=C2907088, MFR P/N="FRC0603J104 TS", Description="Resistor, small US symbol", ki_fp_filters=R_*
R17 R18 R19: library part R_0603_1608Metric, "Resistor SMD 0603 (1608 Metric), square (rectangular) end terminal, IPC-7351 nominal, (Body size source: IPC-SM-782 page 72, https://www.pcb-3d.com/wordpress/wp-content/uploads/ipc-sm-782a_amendment_1_and_2.pdf), generated with kicad-footprint-generator", LCSC=C2907042, MFR P/N=FRC0603F4702TS, Description="Resistor, small US symbol", ki_fp_filters=R_*
R20: library part R_0603_1608Metric, "Resistor SMD 0603 (1608 Metric), square (rectangular) end terminal, IPC-7351 nominal, (Body size source: IPC-SM-782 page 72, https://www.pcb-3d.com/wordpress/wp-content/uploads/ipc-sm-782a_amendment_1_and_2.pdf), generated with kicad-footprint-generator", LCSC=C2906995, MFR P/N=FRC0603F1502TS, Description="Resistor, small US symbol", ki_fp_filters=R_*
R21: library part R_0603_1608Metric, "Resistor SMD 0603 (1608 Metric), square (rectangular) end terminal, IPC-7351 nominal, (Body size source: IPC-SM-782 page 72, https://www.pcb-3d.com/wordpress/wp-content/uploads/ipc-sm-782a_amendment_1_and_2.pdf), generated with kicad-footprint-generator", LCSC=C2907166, MFR P/N="FRC0603J472 TS", Description="Resistor, small US symbol", ki_fp_filters=R_*
R25: library part R_0603_1608Metric, "Resistor SMD 0603 (1608 Metric), square (rectangular) end terminal, IPC-7351 nominal, (Body size source: IPC-SM-782 page 72, https://www.pcb-3d.com/wordpress/wp-content/uploads/ipc-sm-782a_amendment_1_and_2.pdf), generated with kicad-footprint-generator", LCSC=C2907091, MFR P/N="FRC0603J100 TS", Description="Resistor, small US symbol", ki_fp_filters=R_*
REF**: library part Symbol_Barrel_Polarity, "Barrel connector polarity indicator"
TP10 TP11: library part TestPoint_Bridge_Pitch5.08mm_Drill1.3mm, "wire loop as test point, pitch 5.08mm, hole diameter 1.3mm, wire diameter 1.0mm", Description="test point (alternative shape)", ki_fp_filters="Pin* Test*"
U1: library part HSOP-8-1EP_3.9x4.9mm_P1.27mm_EP2.41x3.1mm_ThermalVias, "HSOP, 8 Pin (https://www.st.com/resource/en/datasheet/l5973d.pdf), generated with kicad-footprint-generator ipc_gullwing_generator.py", LCSC=C44377, MFR P/N=TPS54360DDAR, Datasheet=http://www.ti.com/lit/ds/symlink/tps54360.pdf, Description="3.5A, Step Down DC-DC Converter with Eco-mode, 4.5-60V Input Voltage, PowerSO-8", Absolute minimum=TPS54360DDA, Reference MFG P/N=C44377, ki_fp_filters=TI*SO*PowerPAD*ThermalVias*
U2: library part SSOP-10_3.9x4.9mm_P1.00mm, "10-Lead SSOP, 3.9 x 4.9mm body, 1.00mm pitch (http://www.st.com/resource/en/datasheet/viper01.pdf)", MFR P/N=CN3767, LCSC=C81968
U3: library part SOT-23, "SOT, 3 Pin (JEDEC TO-236 Var AB https://www.jedec.org/document_search?search_api_views_fulltext=TO-236), generated with kicad-footprint-generator ipc_gullwing_generator.py", LCSC=C23892, MFR P/N=TL431AIDBZR, Datasheet=http://www.ti.com/lit/ds/symlink/tl431.pdf, Description="Shunt Regulator, SOT-23", ki_fp_filters=SOT?23*
U4: library part SOIC-8_3.9x4.9mm_P1.27mm, "SOIC, 8 Pin (JEDEC MS-012AA, https://www.analog.com/media/en/package-pcb-resources/package/pkg_pdf/soic_narrow-r/r_8.pdf), generated with kicad-footprint-generator ipc_gullwing_generator.py", LCSC=C67470, MFR P/N=LM393DR, Datasheet=http://www.ti.com/lit/ds/symlink/lm393.pdf, Description="Low-Power, Low-Offset Voltage, Dual Comparators, DIP-8/SOIC-8/TO-99-8", ki_fp_filters="SOIC*3.9x4.9mm*P1.27mm* DIP*W7.62mm* SOP*5.28x5.23mm*P1.27mm* VSSOP*3x3mm*P0.65mm* TSSOP*4.4x3mm*P0.65mm*"

## Via types
v1: diameter 0.6, hole 0.3, F.Cu to B.Cu, tented both sides, 288 vias

## Nets (pads, with @x,y where several pads share a name; then routed paths per layer and width w, separated by ;. In a path a pad name is that pad's centre, name@x,y a point inside that pad or via, vN(x,y) a via of type N, cw(c..) or ccw(c..) an arc to the next point about the centre after c; other vN are vias at no path point)
+12V: C8.2 C9.2 C10.2 D6.2 L1.2 Q2.1 R5.1 R15.2 | length 5.9
  F.Cu w0.406: R5.1 114.131,58.61 v1(114.156,58.585)
  B.Cu w0.406: v1(109.456,58.785) 109.656,58.585 v1(114.156,58.585)
  other v1: 109.456,46.185 110.256,46.185 109.456,46.985 110.256,46.985 109.456,47.785 110.256,47.785 109.456,48.585 110.256,48.585 109.456,49.385 110.256,49.385 109.456,59.485 109.456,60.185 109.456,60.885 109.456,61.585 109.456,62.285 109.456,62.985 109.456,63.685
BAT+: F3.1 J3.1 TP10.1
GND: C1.1 C2.1 C3.1 C4.1 C6.2 C7.2 C8.1 C9.1 C10.1 C11.2 C12.2 C13.2 C15.2 C16.2 C17.2 C18.2 D1.2 D2.2 D5.3 H1.1 H2.1 H3.1 H4.1 J1.2 J2.2 J3.2 J4.2 Q3.2 R2.2 R3.2 R7.2 R11.2 R15.1 R19.2 R21.2 R24.2 TP11.1 U1.7 U1.9 U2.2 U3.3 U4.4
  other v1: 74.356,47.193 76.356,47.193 78.356,47.193 80.356,47.193 90.356,47.193 92.356,47.193 94.356,47.193 96.356,47.193 98.356,47.193 100.356,47.193 102.356,47.193 116.356,47.193 118.356,47.193 120.356,47.193 122.356,47.193 74.356,49.193 76.356,49.193 78.356,49.193 80.356,49.193 84.356,49.193 90.356,49.193 116.356,49.193 118.356,49.193 120.356,49.193 122.356,49.193 126.356,49.193 112.356,51.193 114.356,51.193 116.356,51.193 118.356,51.193 120.356,51.193 122.356,51.193 128.356,53.193 98.656,54.985 102.356,55.193 104.356,55.193 128.356,55.193 90.456,56.685 100.956,57.085 98.356,57.193 102.356,57.193 104.356,57.193 106.356,57.193 112.356,57.193 116.356,57.193 118.356,57.193 120.356,57.193 122.356,57.193 128.356,57.193 90.056,57.985 74.356,59.193 76.356,59.193 78.356,59.193 80.356,59.193 82.356,59.193 106.356,59.193 118.356,59.193 120.356,59.193 122.356,59.193 128.356,59.193 97.656,59.585 80.356,61.193 82.356,61.193 90.356,61.193 96.356,61.193 106.356,61.193 118.356,61.193 120.356,61.193 122.356,61.193 128.356,61.193 85.756,62.185 87.256,62.185 90.356,63.192 95.756,63.185 106.356,63.192 118.356,63.192 120.356,63.192 122.356,63.192 124.356,63.192 126.356,63.192 128.356,63.192 95.756,64.885 106.356,65.193 108.356,65.193 110.356,65.193 118.356,65.193 124.356,65.193 126.356,65.193 128.356,65.193 80.356,67.193 94.356,67.193 106.356,67.193 108.356,67.193 118.356,67.193 124.356,67.193 126.356,67.193 128.356,67.193 101.456,68.085 74.356,69.193 76.356,69.193 78.356,69.193 80.356,69.193 118.356,69.193 124.356,69.193 126.356,69.193 128.356,69.193 101.401,69.843 118.356,71.193 126.356,71.193 128.356,71.193 101.456,71.585 114.356,73.193 116.356,73.193 118.356,73.193 128.356,73.193 84.356,75.193 86.356,75.193 88.356,75.193 90.356,75.193 98.356,75.193 100.356,75.193 102.356,75.193 114.356,75.193 116.356,75.193 118.356,75.193 128.356,75.193 77.556,76.085 78.356,77.192 84.356,77.192 86.356,77.192 88.356,77.192 90.356,77.192 92.356,77.192 100.356,77.192 118.356,77.192 128.356,77.192 98.856,78.785 100.056,78.785 78.356,79.193 84.356,79.193 86.356,79.193 88.356,79.193 90.356,79.193 118.356,79.193 126.356,79.193 128.356,79.193 78.356,81.193 84.356,81.193 86.356,81.193 88.356,81.193 90.356,81.193 118.356,81.193 128.356,81.193 74.356,83.193 84.356,83.193 86.356,83.193 88.356,83.193 108.356,83.193 116.356,83.193 118.356,83.193 128.356,83.193 100.056,83.285 74.356,85.193 84.356,85.193 86.356,85.193 88.356,85.193 100.056,85.185 116.356,85.193 124.356,85.193 126.356,85.193 128.356,85.193 74.356,87.193 76.356,87.193 84.356,87.193 86.356,87.193 88.356,87.193 122.356,87.193 124.356,87.193 126.356,87.193 128.356,87.193 100.056,87.285 74.356,89.193 84.356,89.193 86.356,89.193 88.356,89.193 100.356,89.193 112.356,89.193 120.356,89.193 124.356,89.193 126.356,89.193 128.356,89.193 92.356,90.085 93.456,90.085 84.356,91.192 86.356,91.192 88.356,91.192 92.356,91.192 98.356,91.192 100.356,91.192 120.356,91.192 124.356,91.192 126.356,91.192 128.356,91.192 84.356,93.193 86.356,93.193 88.356,93.193 98.356,93.193 100.356,93.193 122.356,93.193 124.356,93.193 126.356,93.193 128.356,93.193 84.356,95.193 86.356,95.193 88.356,95.193 122.356,95.193 124.356,95.193 126.356,95.193 128.356,95.193 104.856,97.185 106.356,97.193 114.356,97.193 116.356,97.193 118.356,97.193 120.356,97.193 122.356,97.193 97.556,97.685 74.356,99.193 76.356,99.193 78.356,99.193 80.356,99.193 84.356,99.193 104.856,99.185 106.356,99.193 112.356,99.193 114.356,99.193 116.356,99.193 118.356,99.193 120.356,99.193 122.356,99.193 126.356,99.193 74.356,101.193 76.356,101.193 78.356,101.193 80.356,101.193 104.356,101.193 106.356,101.193 112.356,101.193 114.356,101.193 116.356,101.193 118.356,101.193 120.356,101.193 122.356,101.193
Net-(C6-Pad1): C6.1 R4.2 | length 1.5
  F.Cu w0.406: C6.1 R4.2
Net-(C15-Pad1): C15.1 R13.2 | length 1.6
  F.Cu w0.406: R13.2 112.006,84.093 C15.1
Net-(C19-Pad2): C19.2 Q4.1 Q4.2 Q4.3 Q5.1 Q5.2 Q5.3 R26.2 | length 4.3
  F.Cu w0.406: Q4.1 79.039,61.968 79.964,62.893 R26.2 80.806,62.943 C19.2
Net-(D1-K): C5.2 D1.1 L1.1 U1.8
Net-(D2-K): D2.1 JP1.3 R8.2 | length 7.5
  F.Cu w0.406: R8.2 v1(107.656,81.785) D2.1 ; JP1.3 108.299,77.328 v1(108.956,77.985)
  B.Cu w0.406: v1(107.656,81.785) 108.956,80.485 v1(108.956,77.985)
Net-(D3-A): D3.2 D4.2 R12.2 | length 4.2
  F.Cu w0.406: R12.2 113.006,76.26 D3.2 D4.2
Net-(D3-K): D3.1 U2.4 | length 13
  F.Cu w0.406: U2.4 109.256,86.948 109.693,87.385 111.635,87.385 114.456,84.564 114.456,80.485 114.056,80.085 D3.1
Net-(D4-K): D4.1 U2.3 | length 15.4
  F.Cu w0.406: U2.3 108.256,86.985 109.263,87.992 111.886,87.992 115.063,84.815 115.063,80.578 115.856,79.785 D4.1
Net-(D5-K): D5.2 L2.1
Net-(F3-Pad2): F3.2 Q5.5 Q5.6 Q5.7 Q5.8
Net-(JP1-A): JP1.1 R10.2 R11.1 | length 10.7
  F.Cu w0.406: JP1.1 105.156,75.785 106.056,74.885 108.156,74.885 109.156,75.885 109.156,77.085 109.981,77.91 R11.1 110.481,77.935 R10.2
Net-(JP1-C): JP1.2 U2.6 | length 20.3
  F.Cu w0.406: v1(106.456,76.185) JP1.2 ; U2.6 v1(110.256,92.585)
  B.Cu w0.406: v1(106.456,76.185) 106.456,86.985 108.656,89.185 110.256,90.785 v1(110.256,92.585)
Net-(Q1-D): D5.1 Q1.2
Net-(Q1-G): Q1.1 U2.10 | length 10.6
  F.Cu w0.406: Q1.1 100.164,94.785 v1(100.256,94.785) ; v1(106.256,90.285) U2.10
  B.Cu w0.406: v1(100.256,94.785) 101.756,94.785 v1(106.256,90.285)
Net-(Q1-S): C11.1 C12.1 C13.1 C14.1 F2.2 Q1.3 R8.1 R9.1 R12.1 U2.9 | length 21.9
  F.Cu w0.406: C12.1 104.556,90.543 104.556,85.485 105.181,84.86 C14.1 105.181,81.835 R8.1 105.131,79.985 R9.1 106.831,80.485 111.356,80.485 112.056,79.785 R12.1
Net-(Q3-D): Q3.3 R25.2 | length 1.9
  F.Cu w0.406: R25.2 Q3.3
Net-(Q3-G): Q3.1 R23.2 R24.1 | length 3.8
  F.Cu w0.406: R24.1 83.256,73.243 83.256,71.418 83.581,71.743 R23.2
Net-(Q4-G): C19.1 Q4.4 Q5.4 R25.1 R26.1 | length 13.8
  F.Cu w0.406: v1(73.956,61.985) 73.973,61.968 Q4.4 ; Q5.4 78.526,65.215 v1(79.199,64.543) R26.1 82.306,64.543 C19.1 R25.1
  B.Cu w0.406: v1(73.956,61.985) 76.513,64.543 v1(79.199,64.543)
Net-(R5-Pad2): R5.2 R6.1 | length 1.7
  F.Cu w0.406: R5.2 R6.1
Net-(R10-Pad1): R9.2 R10.1 | length 1.4
  F.Cu w0.406: R9.2 R10.1
Net-(R22-Pad2): R22.2 R23.1 U4.1 | length 10.3
  F.Cu w0.406: R23.1 84.964,70.085 v1(86.156,70.085) ; U4.1 v1(90.156,64.618) R22.2
  B.Cu w0.406: v1(86.156,70.085) 90.156,66.085 v1(90.156,64.618)
Net-(U1-BOOT): C5.1 U1.1 | length 2
  F.Cu w0.406: U1.1 104.431,67.558 C5.1
Net-(U1-COMP): C7.1 R4.1 U1.6 | length 6.3
  F.Cu w0.406: C7.1 94.256,71.385 95.038,72.168 R4.1 95.873,72.168 97.564,70.478 U1.6
Net-(U1-EN): R1.2 R2.1 U1.3 | length 9.5
  F.Cu w0.406: U1.3 104.848,70.478 105.356,70.985 105.356,72.785 106.456,73.885 108.156,73.885 108.706,73.335 R1.2 R2.1
Net-(U1-FB): R6.2 R7.1 U1.5 | length 23.5
  F.Cu w0.406: U1.5 98.756,71.753 v1(98.756,72.685) ; R6.2 v1(114.131,62.285) R7.1
  B.Cu w0.406: v1(98.756,72.685) 105.756,72.685 114.156,64.285 114.156,62.31 v1(114.131,62.285)
Net-(U1-RT{slash}CLK): R3.1 U1.4 | length 1.7
  F.Cu w0.406: U1.4 104.051,73.455 R3.1
Net-(U1-VIN): C1.2 C2.2 C3.2 C4.2 F1.2 R1.1 U1.2 | length 5.9
  F.Cu w0.406: U1.2 105.234,69.208 105.256,69.185 105.963,69.892 105.963,72.292 106.414,72.743 R1.1
Net-(U2-COM): R13.1 U2.5 | length 2.2
  F.Cu w0.406: U2.5 110.256,84.193 R13.1
Net-(U2-CSP): L2.2 R14.1 U2.8 | length 15.2
  F.Cu w0.406: U2.8 v1(108.256,92.585)
  B.Cu w0.406: v1(103.056,81.985) 103.056,87.685 104.556,89.185 106.756,89.185 108.256,90.685 v1(108.256,92.585)
Net-(U2-VG): C14.2 U2.1 | length 3.1
  F.Cu w0.406: U2.1 106.256,84.885 106.731,84.41 C14.2
Net-(U3-K): R16.2 U3.1 U3.2 U4.2 | length 9.7
  F.Cu w0.406: U3.1 U3.2 87.218,70.423 87.256,70.385 87.288,70.385 R16.2 88.856,68.818 88.856,66.785 87.891,65.82 U4.2
Net-(U4A-+): R20.2 R21.1 U4.3 | length 4.8
  F.Cu w0.406: U4.3 86.621,67.903 R21.1 R20.2
Net-(U4B-+): R17.2 R18.1 U4.5 | length 4.4
  F.Cu w0.406: R17.2 R18.1 85.351,57.588 U4.5
Net-(U4B--): R18.2 R19.1 U4.6 | length 4.3
  F.Cu w0.406: U4.6 86.621,57.208 R18.2 R19.1
OUTBP: D6.1 J4.1 Q2.3
P+: C16.1 C17.1 C18.1 Q2.2 Q4.5 Q4.6 Q4.7 Q4.8 R14.2 R16.1 R17.1 R20.1 R22.1 U2.7 U4.8 | length 35
  F.Cu w0.406: U4.8 90.906,59.668 C18.1 92.556,59.418 92.556,64.868 R22.1 ; U2.7 v1(109.256,92.585)
  B.Cu w0.406: v1(95.856,80.985) 103.256,80.985 103.756,81.485 103.856,81.585 103.856,82.392 103.663,82.585 103.663,83.485 103.663,87.433 103.935,87.706 104.808,88.578 105.556,88.578 107.008,88.578 108.508,90.078 109.256,90.826 v1(109.256,92.585)
unconnected-(J1-Pad3): J1.3
unconnected-(U4-Pad7): U4.7
VIN: F1.1 F2.1 J1.1 J2.1
pads on no net: D5.Un1 D5.Un2 D5.Un3 D5.Un4 Q1.Un1 Q1.Un2 Q1.Un3 Q1.Un4 U1.Un1 U1.Un2 U1.Un3 U1.Un4

## Polygon pours and split planes (outlines as drawn)
GND on F.Cu "F.Cu-GND" (solid, remove dead copper, pour order 37): 72.456,103.085 130.456,103.085 130.556,102.985 130.556,45.085 72.456,45.085 72.356,45.185 72.356,102.985
VIN on F.Cu "F.Cu-/Buck/VIN-2" (solid, remove dead copper, pour order 32): 120.956,76.185 122.056,77.285 126.256,77.285 126.556,76.985 126.556,74.485 123.456,71.385 123.456,66.685 122.656,65.885 121.256,65.885 120.956,66.185
Net-(U2-CSP) on F.Cu "F.Cu-Net-(U2-CSP)" (solid, remove dead copper, pour order 31): 101.856,88.485 103.456,88.485 103.556,88.385 103.556,78.185 103.256,77.885 102.356,77.885 101.156,79.085 101.156,87.785
P+ on F.Cu "F.Cu-/Battery Protect/P+-1" (solid, remove dead copper, pour order 30): 108.756,50.885 108.756,52.085 108.656,52.185 104.356,52.185 103.256,53.285 92.756,53.285 90.656,55.385 83.756,55.385 81.756,57.385 74.456,57.385 74.456,55.385 75.356,54.485 80.856,54.485 82.356,52.985 88.256,52.985 91.656,49.585 103.256,49.585 104.356,50.685 108.556,50.685
+12V on F.Cu "F.Cu-+12V-1" (solid, remove dead copper, pour order 33): 107.456,58.485 107.456,64.085 110.856,64.085 110.856,58.485
+12V on F.Cu "F.Cu-+12V" (solid, remove dead copper, pour order 29): 114.656,45.885 114.656,47.885 112.756,49.785 106.656,49.785 105.756,48.885 105.756,46.585 106.556,45.785 114.556,45.785
VIN on F.Cu "F.Cu-/Buck/VIN-1" (solid, remove dead copper, pour order 28): 115.356,87.885 120.956,82.285 120.956,76.085 121.756,75.285 126.256,75.285 126.556,75.585 126.556,76.985 125.656,77.885 124.456,77.885 123.856,78.485 123.856,82.785 117.856,88.785 117.856,91.685 117.156,92.385 115.456,92.385 115.356,92.285
Net-(Q1-S) on F.Cu "F.Cu-Net-(Q1-S)-1" (solid, remove dead copper, pour order 27): 103.156,96.085 103.156,101.185 98.456,101.185 98.156,100.885 98.156,99.185 101.356,95.985 103.056,95.985
Net-(Q1-D) on F.Cu "F.Cu-Net-(Q1-D)" (solid, remove dead copper, pour order 26): 89.856,100.985 95.756,100.985 95.956,100.785 95.956,91.485 95.456,90.985 94.556,90.985 89.856,95.685
VIN on F.Cu "F.Cu-/Buck/VIN" (solid, remove dead copper, pour order 25): 117.156,92.385 111.456,98.085 111.456,100.385 110.556,101.285 108.356,101.285 108.156,101.085 108.156,96.285 113.456,90.985 113.456,89.785 115.356,87.885 117.056,87.885 117.156,87.985
P+ on F.Cu "F.Cu-/Battery Protect/P+" (solid, remove dead copper, pour order 24): 94.456,81.285 94.356,81.185 94.356,75.885 89.456,70.985 89.456,67.785 91.956,65.285 91.956,56.685 90.656,55.385 90.656,53.685 92.656,51.685 94.056,51.685 95.656,53.285 95.656,59.385 94.256,60.785 94.256,65.685 92.156,67.785 92.156,70.685 97.656,76.185 97.656,81.285
Net-(Q1-S) on F.Cu "F.Cu-Net-(Q1-S)" (solid, remove dead copper, pour order 23): 107.456,90.985 107.456,94.285 106.656,95.085 104.556,95.085 103.856,95.785 103.856,99.885 102.556,101.185 101.956,101.185 101.056,100.285 101.056,96.285 102.256,95.085 102.756,95.085 103.156,94.685 103.156,90.885 103.456,90.585 104.656,90.585 105.356,91.285 105.356,92.285 105.856,92.785 106.556,92.785 107.056,92.285 107.056,90.985
Net-(D5-K) on F.Cu "F.Cu-Net-(D5-K)" (solid, remove dead copper, pour order 36): 89.956,88.885 98.256,88.885 98.756,88.385 98.756,82.785 98.456,82.485 90.356,82.485 89.856,82.985 89.856,88.785
Net-(F3-Pad2) on F.Cu "F.Cu-Net-(F3-Pad2)" (solid, remove dead copper, pour order 35): 74.456,70.885 74.456,73.685 73.756,74.385 73.756,80.585 73.956,80.785 75.456,80.785 76.556,79.685 76.556,75.585 78.756,73.385 78.756,71.085 78.556,70.885
Net-(U1-VIN) on F.Cu "F.Cu-Net-(U1-VIN)" (solid, remove dead copper, pour order 22): 115.956,71.185 114.256,71.185 112.756,69.685 104.956,69.685 104.756,69.485 103.356,69.485 103.356,68.885 104.756,68.885 104.956,68.685 108.656,68.685 111.556,65.785 114.656,65.785 115.956,67.085
Net-(C19-Pad2) on F.Cu "F.Cu-Net-(C19-Pad2)" (solid, remove dead copper, pour order 21): 75.756,63.485 74.456,64.785 74.456,67.085 77.456,67.085 77.456,64.785 78.756,63.485 78.756,61.185 75.756,61.185
Net-(D1-K) on F.Cu "F.Cu-Net-(D1-K)" (solid, remove dead copper, pour order 20): 97.856,68.185 97.356,67.685 97.356,65.785 97.156,65.585 97.156,62.985 101.656,58.485 103.956,58.485 104.356,58.885 104.356,64.785 102.456,66.685 100.856,66.685 99.456,68.085 99.456,68.185
OUTBP on F.Cu "F.Cu-/ByPass/OUTBP" (solid, remove dead copper, pour order 19): 107.256,54.385 111.056,54.385 111.556,54.885 119.556,54.885 119.656,54.785 122.756,54.785 124.656,56.685 126.456,56.685 126.556,56.585 126.556,54.943 124.198,52.585 109.256,52.585 108.756,53.085 107.356,53.085 107.256,53.185 107.256,54.385
BAT+ on F.Cu "F.Cu-/Battery Protect/BAT+" (solid, remove dead copper, pour order 18): 82.356,75.585 82.356,94.885 79.856,97.385 73.856,97.385 73.256,96.785 73.256,92.085 76.656,88.685 78.156,88.685 79.256,87.585 79.256,76.285 80.256,75.285 82.056,75.285
+12V on B.Cu "B.Cu-+12V" (solid, remove dead copper, pour order 34): 108.556,64.085 108.556,46.285 108.956,45.885 110.456,45.885 110.856,46.285 110.856,63.885 110.556,64.185 108.656,64.185
GND on B.Cu "B.Cu-GND" (solid, remove dead copper, pour order 38): 72.456,103.085 130.456,103.085 130.556,102.985 130.556,45.085 72.456,45.085 72.356,45.185 72.356,102.985

## Silkscreen, mask and mechanical layers (free items; w line width, h text height)
F.SilkS:
  lines w0.254: 72.456,54.743 90.656,54.743 92.806,56.892 ; 72.456,74.443 90.656,74.443 92.806,72.293 ; 88.856,103.143 88.856,80.543 94.956,74.443 ; 100.256,45.143 100.256,54.653 101.356,55.753 115.956,55.753 117.166,54.543 117.156,45.143 ; 106.556,74.485 106.556,75.985 ; 111.656,103.143 111.656,87.743 117.256,82.143 117.256,75.243 116.456,74.443 ; 92.806,56.892 93.956,55.743 115.956,55.743 117.256,57.053 117.256,60.843 117.256,72.843 117.256,73.643 116.456,74.443 ; 92.806,56.892 92.806,72.293 ; 92.806,72.293 94.956,74.443 ; 94.956,74.443 115.656,74.443 116.456,74.443 ; 103.456,74.485 103.456,75.785 103.456,75.985 109.556,75.985 109.556,74.485 103.456,74.485
  text "25V/3A Max" at 112.956,99.171 h1
  text "-" at 113.956,97.643 h1
  text "BAT+" at 72.356,97.443 h1
  text "+" at 119.956,97.214 h1
  text "For evaluation Only,  / not FCC approved for resale" at 88.064,94.985 h0.61 r90
  text "12V Lead Acid" at 85.18,92.443 h1 r90
  text "+ BAT -" at 83.656,90.343 h1 r90
  text "INPUT" at 114.756,87.643 h1 r90
  text "CHARGER" at 88.392,80.296 h1 r135
  text "DO" at 112.456,79.185 h1
  text "CH" at 114.756,79.185 h1
  text "+ VIN -" at 120.756,75.343 h1 r90
  text "MPPT" at 103.656,74.48 h0.61
  text "NORM" at 106.656,74.48 h0.61
  text "INPUT" at 125.356,71.043 h1
  text "12V/2A" at 124.156,64.971 h1
  text "OUPUT" at 124.756,63.443 h1
  text "+ OUT -" at 120.756,54.543 h1 r90
  text "BUCK" at 93.556,53.743 h1